# Altium PCB HE280PCB-panel.PcbDoc
Units mm, origin at the board's own origin, x right, y up, seen from the top; angles counter-clockwise.
Board outline 210.38 x 58.67 mm, 2 copper layers (Top Layer, Bottom Layer), stack 1.544 mm thick; 8 components, 271 nets, 12 pads, 0 vias.
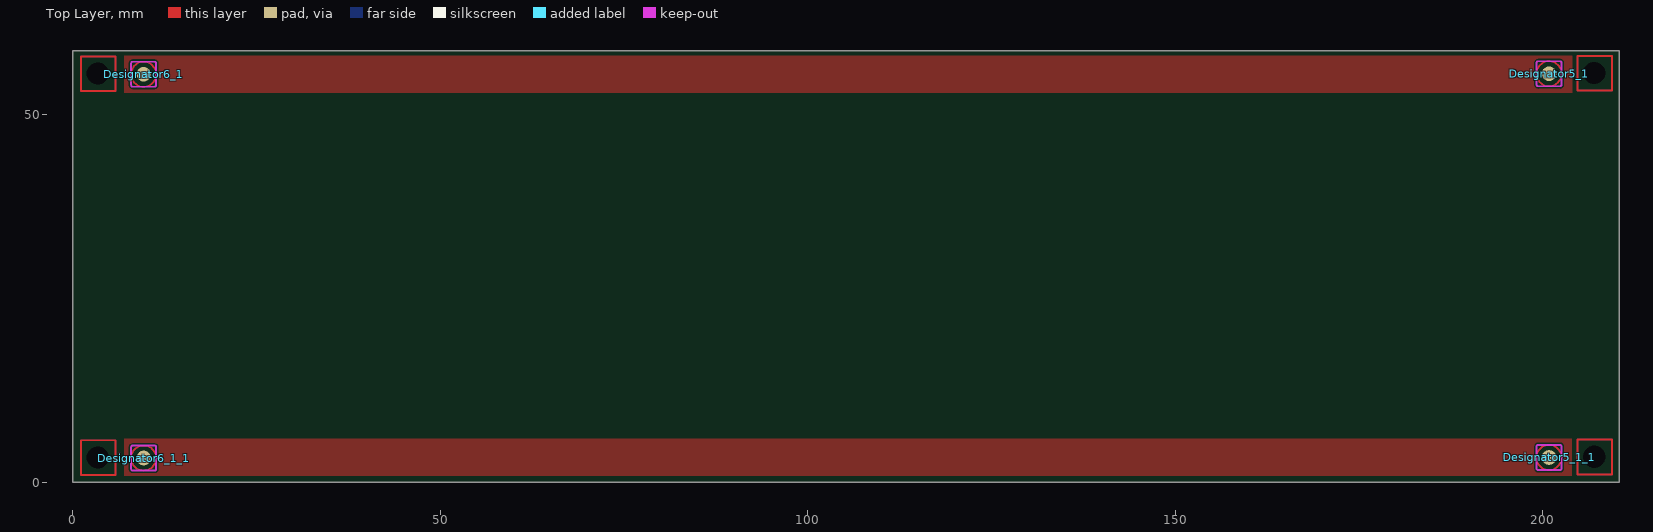
[diagram p0: Top Layer view]
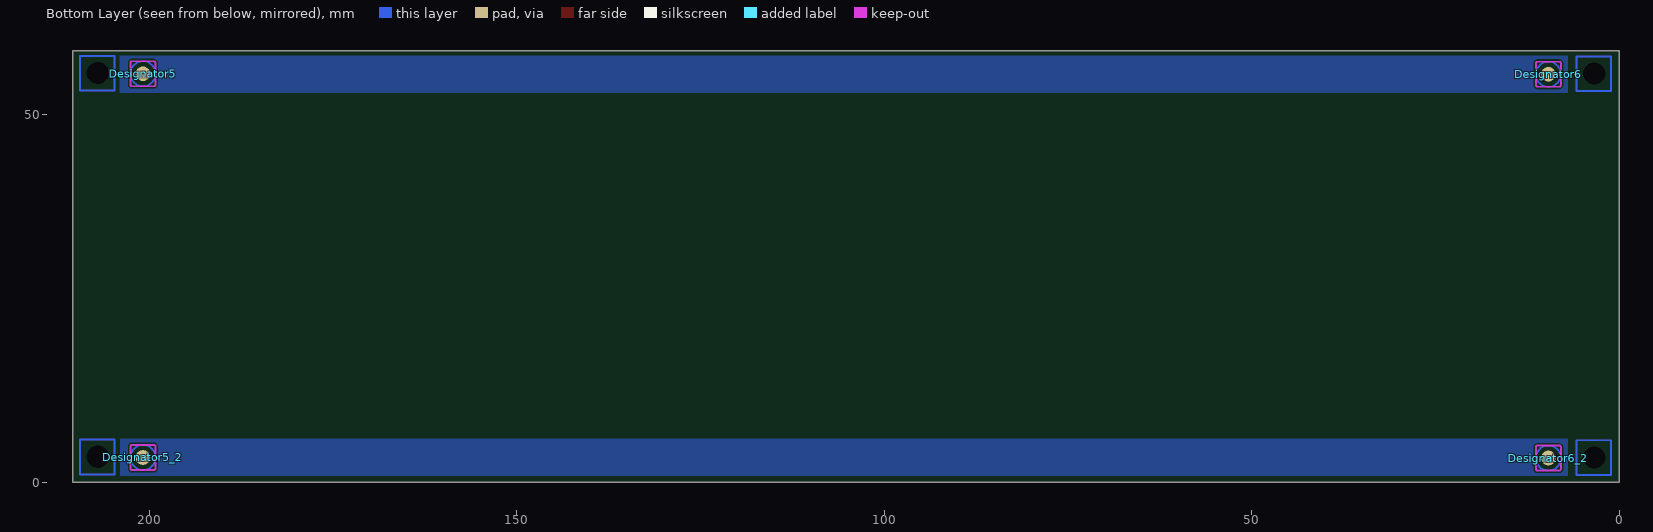
[diagram p1: Bottom Layer view, seen from below]

## Layer stack, top to bottom
Top Solder: solder mask 0.0102, Solder Resist, Dk 3.5
Top Layer: signal copper 0.0356
Dielectric1: core 1.4732, FR-4 TG170, Dk 4.2
Bottom Layer: signal copper 0.0356
Bottom Solder: solder mask 0.0102, Solder Resist, Dk 3.5

## Board outline
0,0 0,58.67 210.384,58.67 210.384,0

## Design rules (kind name [scope] priority, off if disabled: settings)
AcuteAngle [All] p1: minimum=6.00000000000000E+0001 checktracksonly=FALSE
AssemblyTestpoint [All] p1: testpointundercomponent=FALSE minsize=1.016 maxsize=2.54 preferedsize=1.524 minholesize=0 maxholesize=1.016 preferedholesize=0.813 testpointgrid=0.025 usegrid=FALSE gridtolerance=0 allowsidetop=TRUE allowsidebottom=TRUE minspacing=2.54 compbodyclearance=3.556
Clearance Clearance_PWR_INPUT_POLYGONS [InPolygon and InNetClass('PWR_INPUT')] p1: gap=0.254
Clearance Clearance_PWR_INPUT_POLYGONS_1 [InNetClass('Can bus')    and IsTrack] p2: gap=0.203
Clearance [All] p3: gap=0.178
DiffPairsRouting [All] p1: maxlimit=0.254 minlimit=0.178 mostfreqgap=0.203 toplayer_minwidth=0.178 toplayer_maxwidth=0.381 toplayer_prefwidth=0.203 bottomlayer_minwidth=0.178 bottomlayer_maxwidth=0.381 bottomlayer_prefwidth=0.203 maxuncoupledlength=5.08
FabricationTestPointUsage [All] p1: valid=2 allowmultiple=FALSE
FabricationTestpoint [All] p1: side=3 testpointundercomponent=TRUE minsize=1.016 maxsize=2.54 preferedsize=1.524 minholesize=0 maxholesize=1.016 preferedholesize=0.813 testpointgrid=0.025 allowsidetop=TRUE allowsidebottom=TRUE usegrid=FALSE gridtolerance=0
FanoutControl Fanout_SOIC [(InComponent('U8') AND InComponent('U7'))] p3: bgadir=Out bgaviamode=Centered fanoutstyle=Staggered fanoutdirection=Alternating viagrid=0.025 // Fanout_SOIC (Default Rule)
FanoutControl Fanout_Small [All] p4: bgadir=Out bgaviamode=Centered fanoutstyle=Auto fanoutdirection=Alternating viagrid=0.025 // Fanout_Small (Default Rule)
HoleSize [All] p1: absolutevalues=TRUE maxlimit=5.08 minlimit=0.254 maxpercent=80.000 minpercent=20.000
MinimumAnnularRing [All] p1: minimumring=0.178
MinimumSolderMaskSliver [All] p1 off: minsoldermaskwidth=0.254
PasteMaskExpansion [All] p1: expansion=-0.025
PlaneClearance [All] p1: clearance=0.178
PlaneConnect PlaneConnect_Via [IsVia] p1: planeconnectstyle=Direct reliefexpansion=0.889 reliefentries=4 reliefconductorwidth=1.27 reliefairgap=0.254
PlaneConnect PlaneConnect_C7_Ground [InComponent('C7') and OnLayer('Groun Plane')] p2: planeconnectstyle=Relief reliefexpansion=0.305 reliefentries=4 reliefconductorwidth=0.356 reliefairgap=0.254
PlaneConnect PlaneConnect_PWR_INPUT [InNetClass('PWR_INPUT')] p3: planeconnectstyle=NoConnect reliefexpansion=0.889 reliefentries=4 reliefconductorwidth=1.27 reliefairgap=0.254
PlaneConnect PlaneConnect_Power_Plane [OnLayer('Power Plane')] p4: planeconnectstyle=Relief reliefexpansion=0.305 reliefentries=4 reliefconductorwidth=0.356 reliefairgap=0.254
PlaneConnect PlaneConnect_GND_Plane [OnLayer('Groun Plane')] p5: planeconnectstyle=NoConnect reliefexpansion=0.889 reliefentries=4 reliefconductorwidth=1.27 reliefairgap=0.254
PlaneConnect [All] p6: planeconnectstyle=Relief reliefexpansion=0.305 reliefentries=4 reliefconductorwidth=0.356 reliefairgap=0.254
PolygonConnect Vias [IsVia] p1: connectstyle=Direct reliefconductorwidth=0.254 reliefentries=4 polygonreliefangle="90 Angle" airgapwidth=0.254
PolygonConnect "J3 Top" [InComponent('J3') vs ((InNet('NetF2_1') And OnLayer('Top Layer')) or (InNet('NetF1_1') And OnLayer('Top Layer')) or (InNet('GND') And OnLayer('Top Layer')) or (InNet('NetF3_1') And OnLayer('Top Layer')))] p2: connectstyle=Relief reliefconductorwidth=0.305 reliefentries=4 polygonreliefangle="90 Angle" airgapwidth=0.254
PolygonConnect "FAN-1 Top" [InComponent('FAN-1') vs ((InNet('+12VCC2') And OnLayer('Top Layer')) or (InNet('NetD10_C') And OnLayer('Top Layer')))] p3: connectstyle=Relief reliefconductorwidth=0.305 reliefentries=4 polygonreliefangle="90 Angle" airgapwidth=0.254
PolygonConnect "FAN-1 Bottom" [InComponent('FAN-1') vs ((InNet('+12VCC2') And OnLayer('Bottom Layer')) or (InNet('NetD10_C') And OnLayer('Bottom Layer')))] p4: connectstyle=Relief reliefconductorwidth=0.889 reliefentries=4 polygonreliefangle="90 Angle" airgapwidth=0.254
PolygonConnect "J3 Bottom" [InComponent('J3') vs ((InNet('NetF2_1') And OnLayer('Bottom Layer')) or (InNet('NetF1_1') And OnLayer('Bottom Layer')) or (InNet('GND') And OnLayer('Bottom Layer'))or (InNet('NetF3_1') And OnLayer('Bottom Layer')))] p5: connectstyle=Relief reliefconductorwidth=1.27 reliefentries=4 polygonreliefangle="90 Angle" airgapwidth=0.254
PolygonConnect "F2 Top" [InComponent('F2') vs ((InNet('NetF2_1') And OnLayer('Top Layer')) or (InNet('+12VCC2') And Onlayer('Top Layer')))] p6: connectstyle=Relief reliefconductorwidth=0.305 reliefentries=4 polygonreliefangle="90 Angle" airgapwidth=0.254
PolygonConnect "F3 Top" [InComponent('F3') vs ((InNet('NetF3_1') And OnLayer('Top Layer')) or (InNet('+12VCC1') And Onlayer('Top Layer')))] p7: connectstyle=Relief reliefconductorwidth=0.305 reliefentries=4 polygonreliefangle="90 Angle" airgapwidth=0.254
PolygonConnect "F2 Bottom" [InComponent('F2') vs ((InNet('NetF2_1') And OnLayer('Bottom Layer')) or (InNet('+12VCC2') And Onlayer('Bottom Layer')))] p8: connectstyle=Relief reliefconductorwidth=1.27 reliefentries=4 polygonreliefangle="90 Angle" airgapwidth=0.254
PolygonConnect "F3 Bottom" [InComponent('F3') vs ((InNet('NetF3_1') And OnLayer('Bottom Layer')) or (InNet('+12VCC1') And Onlayer('Bottom Layer')))] p9: connectstyle=Relief reliefconductorwidth=1.27 reliefentries=4 polygonreliefangle="90 Angle" airgapwidth=0.254
PolygonConnect "F1 Top" [InComponent('F1') vs ((InNet('+12VCC3') And OnLayer('Top Layer')) or (InNet('NetF1_1') And OnLayer('Top Layer')))] p10: connectstyle=Relief reliefconductorwidth=0.305 reliefentries=4 polygonreliefangle="90 Angle" airgapwidth=0.254
PolygonConnect "F1 Bottom" [InComponent('F1') vs ((InNet('+12VCC3') And OnLayer('Bottom Layer')) or (InNet('NetF1_1') And OnLayer('Bottom Layer')))] p11: connectstyle=Relief reliefconductorwidth=1.27 reliefentries=4 polygonreliefangle="90 Angle" airgapwidth=0.254
PolygonConnect "J1 Top" [InComponent('J1') vs ((InNet('+12VCC2') And OnLayer('Top Layer')) or (InNet('FN1') And OnLayer('Top Layer')) )] p12: connectstyle=Relief reliefconductorwidth=0.305 reliefentries=4 polygonreliefangle="90 Angle" airgapwidth=0.254
PolygonConnect "J1 Top HTBD" [InComponent('J1') vs ((InNet('HTBD') And OnLayer('Top Layer')) or (InNet('+12VCC3') And OnLayer('Top Layer')) or(InNet('HTR0') And OnLayer('Top Layer')) or (InNet('HTR1') And OnLayer('Top Layer')) or (InNet('HTRA') And OnLayer('Top Layer'))  )] p13: connectstyle=Relief reliefconductorwidth=1.27 reliefentries=4 polygonreliefangle="90 Angle" airgapwidth=0.254
PolygonConnect "J1 Bottom" [InComponent('J1') vs ((InNet('+12VCC2') And OnLayer('Bottom Layer'))or(InNet('HTR0') And OnLayer('Bottom Layer')) or (InNet('HTR1') And OnLayer('Bottom Layer')) or (InNet('HTRA') And OnLayer('Bottom Layer')) or (InNet('HTBD') And OnLayer('Bottom Layer')) or (InNet('+12VCC3') And OnLayer('Bottom Layer'))or (InNet('FN1') And OnLayer('Bottom Layer')))] p14: connectstyle=Relief reliefconductorwidth=1.27 reliefentries=4 polygonreliefangle="90 Angle" airgapwidth=0.254
PolygonConnect "Direct Connect" [(IsNamedPolygon('Motor-Thermal')) Or (IsNamedPolygon('Top Layer-MTR +')) Or (IsNamedPolygon('Fet-DirectConnect')) Or (IsNamedPolygon('DirectConnect') Or InComponent('D7') Or HasFootprint('TP-2') )] p15: connectstyle=Direct reliefconductorwidth=0.254 reliefentries=4 polygonreliefangle="90 Angle" airgapwidth=0.254
PolygonConnect [All] p16: connectstyle=Relief reliefconductorwidth=0.254 reliefentries=4 polygonreliefangle="90 Angle" airgapwidth=0.254
RoutingVias RoutingVias_<15mil [HoleSize < '15'] p1: holewidth=0.61 width=1.016 viastyle="Through Hole" minholewidth=0.254 minwidth=0.61 maxholewidth=1.27 maxwidth=1.778
RoutingVias [All] p2: holewidth=0.61 width=1.016 viastyle="Through Hole" minholewidth=0.381 minwidth=0.737 maxholewidth=1.27 maxwidth=1.778
SMDEntry [All] p1: side=TRUE corner=TRUE anyangle=TRUE
SMDToCorner [All] p1: distance=30000
SilkToSilkClearance [All] p1 off: silktosilkclearance=0.254
SilkToSolderMaskClearance SilkscreenOverComponentPads [IsPad] p1 off: minsilkscreentomaskgap=0.254 clearancetoexposedcopper=TRUE
SolderMaskExpansion [All] p1: expansion=0.102
Width Width_USB [InNet(UMCU_N) And InNet(UMCU_P)] p1: maxlimit=0.203 minlimit=0.203 preferedwidth=0.203
Width Width_Can [InNetClass('Can bus')] p2: maxlimit=0.203 minlimit=0.203 preferedwidth=0.203
Width [All] p3: maxlimit=5.08 minlimit=0.178 preferedwidth=0.203 minimp=50.000000 maximp=50.000000 favimp=50.000000
17 further rules are at their usual default settings.

## Classes and differential pairs
net class "Can bus": PA0_CANTX0 PA1_CANRX0
net class SD: MCCDA MCCK MCDA0 MCDA1 MCDA2 MCDA3 SDCD
net class STEP_BUS[1..4]: STEP_BUS1 STEP_BUS2 STEP_BUS3 STEP_BUS4
net class REF_BUS[1..4]: REF_BUS1 REF_BUS2 REF_BUS3 REF_BUS4
net class MOD2E_BUS[1..4]: MOD2E_BUS1 MOD2E_BUS2 MOD2E_BUS3 MOD2E_BUS4
net class MOD1E_BUS[1..4]: MOD1E_BUS1 MOD1E_BUS2 MOD1E_BUS3 MOD1E_BUS4
net class MOD0E_BUS[1..4]: MOD0E_BUS1 MOD0E_BUS2 MOD0E_BUS3 MOD0E_BUS4
net class EN_BUS[1..4]: EN_BUS1 EN_BUS2 EN_BUS3 EN_BUS4
net class DIR_BUS[1..4]: DIR_BUS1 DIR_BUS2 DIR_BUS3 DIR_BUS4
component class TR2: D3_ThermistorChannel2 D5_ThermistorChannel2 R19_ThermistorChannel2
component class TR1: C30_ThermistorChannel1 D3_ThermistorChannel1 D5_ThermistorChannel1 R19_ThermistorChannel1
net class MIN_ES_BUS[1..3]: MIN_ES0
net class MAX_ES_BUS[1..3]: MAX_ES0
component class Designator: F1 F2 R131 R132
component class Microcontroller: FD2 microSD
component class M1: R32_DriverChannelDRV88251 R33_DriverChannelDRV88251
component class M2: R32_DriverChannelDRV88252 R33_DriverChannelDRV88252
component class M3: R32_DriverChannelDRV88253 R33_DriverChannelDRV88253
component class M4: D5D D6D R32_DriverChannelDRV88254 R33_DriverChannelDRV88254 R129 R130
component class U_MZ: R32_DriverChannelDRV88255 R33_DriverChannelDRV88255
component class "U_MOSFETs and Driver": Q2 Q3
net class THERM_AN_BUS[1..4]: THERM_AN_BUS1 THERM_AN_BUS2 THERM_AN_BUS3 THERM_AN_BUS4
net class PWR_INPUT: +12VCC1 +12VCC2 +12VCC3 NetF1_1 NetF2_1 NetF3_1
net class SPI: PA25_MISO PA26_MOSI PA27_SCLK PA29_CS PB21_CS2 SPIFLASH_CS
component class USB: TP59a
channel class EndStops: ES1 ES2 ES3
channel class Motors: M1 M2 M3 M4
channel class Thermistors: TR1 TR2 TR3 TR4

## Components (designator, comment, footprint, x,y, rotation, side; value= is the part's Value field where it differs from the comment)
Designator5 "Comment" FIDUCIAL-2X3-PANEL 200.858,55.57 r90 bottom
Designator5_1 "Comment" FIDUCIAL-2X3-PANEL 200.858,55.57 r90 top
Designator5_1_1 "Comment" FIDUCIAL-2X3-PANEL 200.858,3.35 r90 top
Designator5_2 "Comment" FIDUCIAL-2X3-PANEL 200.858,3.35 r90 bottom
Designator6 "Comment" FIDUCIAL-2X3-PANEL 9.625,55.495 r90 bottom
Designator6_1 "Comment" FIDUCIAL-2X3-PANEL 9.625,55.495 r90 top
Designator6_1_1 "Comment" FIDUCIAL-2X3-PANEL 9.625,3.275 r90 top
Designator6_2 "Comment" FIDUCIAL-2X3-PANEL 9.625,3.275 r90 bottom

## Footprints (in the part's own frame and the unit in brackets; to place one, negate y for a bottom-side part, rotate by r counter-clockwise, add the part's x,y. Pads: shape width x height; smd on the part's side, far side on the other; paste and mask are expansions set on the pad)
FIDUCIAL-2X3-PANEL [mm]
  rrect100% 2x2 smd paste+0 mask+0.508: 1(0,0)
  Top Layer circle w0.178: c0,0 r1.7
  Keep-Out Layer region: -1.5,-1.7 -1.577,-1.685 -1.641,-1.641 -1.685,-1.577 -1.7,-1.5 -1.7,-1.5 -1.7,1.5 -1.685,1.577 -1.641,1.641 -1.577,1.685 -1.5,1.7 -1.5,1.7 1.5,1.7 1.577,1.685 1.641,1.641 1.685,1.577 1.7,1.5 1.7,1.5 1.7,-1.5 1.685,-1.577 1.641,-1.641 1.577,-1.685 1.5,-1.7 1.5,-1.7
  Keep-Out Layer lines w0.254: -1.5,-1.7 cw(c-1.5,-1.5) -1.7,-1.5 -1.7,1.5 cw(c-1.5,1.5) -1.5,1.7 1.5,1.7 cw(c1.5,1.5) 1.7,1.5 1.7,-1.5 cw(c1.5,-1.5) 1.5,-1.7 -1.5,-1.7
  body extent -1.02,-1.02 1.02,1.02, height 0.02

## Free pads (board coordinates)
  round 0 hole 3 unplated paste-99 mask-0.102: 0(3.375,3.375) 0(3.375,55.595) 1(207.008,3.45) 1(207.008,55.67)

## Nets (pads, with @x,y where several pads share a name; then routed paths per layer and width w, separated by ;. In a path a pad name is that pad's centre, name@x,y a point inside that pad or via, vN(x,y) a via of type N, cw(c..) or ccw(c..) an arc to the next point about the centre after c; other vN are vias at no path point)
3.3VCC: 
+5VCC: 
+12VCC1: 
+12VCC2: 
+12VCC3: 
BED_PWM: 
DECAYA: 
DECAYB: 
DECAYC: 
DECAYD: 
DECAYZ: 
DIR1: 
DIR2: 
DIR3: 
DIR4: 
DIR_Z: 
EN1: 
EN2: 
EN3: 
EN4: 
EN_Z: 
ERASE: 
FET_PWM1: 
FET_PWM2: 
FET_PWM3: 
FET_PWM4: 
FET_PWM5: 
FGND: 
FN1: 
GND: 
HOLD#: 
HTBD: 
HTR0: 
HTR1: 
HTRA: 
LED_R: 
LED_Y: 
MAX_ES1: 
MAX_ES2: 
MAX_ES3: 
MCCDA: 
MCCK: 
MCDA0: 
MCDA1: 
MCDA2: 
MCDA3: 
MIN_ES1: 
MIN_ES2: 
MIN_ES3: 
MOD0E1: 
MOD0E2: 
MOD0E3: 
MOD0E4: 
MOD0E_Z: 
MOD1E1: 
MOD1E2: 
MOD1E3: 
MOD1E4: 
MOD1E_Z: 
MOD2E1: 
MOD2E2: 
MOD2E3: 
MOD2E4: 
MOD2E_Z: 
NetC6_1: 
NetC6_2: 
NetC7_1: 
NetC17_2: 
NetC26_1: 
NetC41_1: 
NetC42_1: 
NetC43_2: 
NetC48_2: 
NetC49_1: 
NetC83_2: 
NetC84_2: 
NetC85_2: 
NetC86_2: 
NetC87_2: 
NetC96_2: 
NetC97_2: 
NetC98_1: 
NetC98_2: 
NetC99_1: 
NetC99_2: 
NetC100_1: 
NetC100_2: 
NetC101_1: 
NetC101_2: 
NetC102_1: 
NetC102_2: 
NetC103_2: 
NetC104_2: 
NetC105_2: 
NetC106_2: 
NetC107_2: 
NetC108_1: 
NetC110_1: 
NetC111_1: 
NetC112_1: 
NetC113_1: 
NetC123_2: 
NetC124_2: 
NetC125_2: 
NetC126_1: 
NetC127_2: 
NetC128_2: 
NetC129_2: 
NetC130_2: 
NetC131_2: 
NetC132_1: 
NetC133_1: 
NetC134_1: 
NetC135_1: 
NetC136_1: 
NetC137_1: 
NetC138_1: 
NetC139_1: 
NetC140_1: 
NetC141_1: 
NetC142_1: 
NetC143_1: 
NetC144_1: 
NetC145_1: 
NetD2_A: 
NetD9_A: 
NetD13_A: 
NetD16_A: 
NetD17_A: 
NetD18_A: 
NetD20_A: 
NetD23_A: 
NetD24_A: 
NetD25_A: 
NetD27_1: 
NetD27_3: 
NetD28_A: 
NetD29_A: 
NetD30_A: 
NetD31_A: 
NetD32_A: 
NetD33_A: 
NetD34_C: 
NetF1_1: 
NetF2_1: 
NetF3_1: 
NetJ14_1: 
NetJ15_1: 
NetJ16_1: 
NetJ17_1: 
NetL5_1: 
NetL5_4: 
NetQ1_4: 
NetQ2_4: 
NetQ3_4: 
NetQ4_4: 
NetQ5_1: 
NetQ6_1: 
NetR1_1: 
NetR2_1: 
NetR10_2: 
NetR15_1: 
NetR16_1: 
NetR17_1: 
NetR18_1: 
NetR19_1: 
NetR20_1: 
NetR21_1: 
NetR22_1: 
NetR23_1: 
NetR24_1: 
NetR25_1: 
NetR27_1: 
NetR42_1: 
NetR48_1: 
NetR51_1: 
NetR77_2: 
NetR82_2: 
NetR83_2: 
NetR121_2: 
NetR122_2: 
NetR123_2: 
NetR124_2: 
NetR125_2: 
NetR126_2: 
NetR127_2: 
NetR128_2: 
NetR129_2: 
NetR130_2: 
NetU3_2: 
NetU4_2: 
NetU5_2: 
NetU7_2: 
NRST: 
PA0_CANTX0: 
PA1_CANRX0: 
PA2_TIOA1: 
PA3_TIOB1: 
PA5_PWM: 
PA8_URXD: 
PA9_UTXD: 
PA12_RXD1: 
PA13_TXD1: 
PA14_RTS1: 
PA15_CTS1: 
PA16_SCK1: 
PA17_SDA: 
PA18_SCL: 
PA25_MISO: 
PA26_MOSI: 
PA27_SCLK: 
PA29_CS: 
PB0_ETXCK: 
PB1_ETXEN: 
PB2_ETX0: 
PB3_ETX1: 
PB4_ECRSDV: 
PB5_ERX0: 
PB6_ERX1: 
PB7_ERXER: 
PB8_EMDC: 
PB9_EMDIO: 
PB12_AD8: 
PB13_AD9: 
PB14_PWMH2: 
PB15_DAC0: 
PB16_DAC1: 
PB21_CS2: 
PB25_TIOA0: 
PB27_TIOB0: 
PC2_PWML0: 
REF1: 
REF2: 
REF3: 
REF4: 
REF_Z: 
RESET: 
SDCD: 
SHDN: 
SNTP: 
SPIFLASH_CS: 
STEP1: 
STEP2: 
STEP3: 
STEP4: 
STEP_Z: 
TCK/SWDCLK: 
TDI: 
TDO/SWO: 
THERM_AN1: 
THERM_AN2: 
THERM_AN3: 
THERM_AN4: 
TMS/SWDIO: 
UD_N: 
UD_P: 
UI_N: 
UI_P: 
UMCU_N: 
UMCU_P: 
USB_GND: 
USBSHIELD: 
VDD1: 
VDDANA: 
VDDOUT: 
VDDPLL: 
VDDUTMI: 
VUSB: 
WP#: 
XIN32: 
XOUT32: 
pads on no net: Designator5.1 Designator5_1.1 Designator5_1_1.1 Designator5_2.1 Designator6.1 Designator6_1.1 Designator6_1_1.1 Designator6_2.1
copper on no net: | length 150.4
  Top Layer w0.254: 1.1,0.975 1.1,5.7 5.775,5.7 5.775,0.975 1.1,0.975 ; 1.1,53.195 5.775,53.195 5.775,57.92 1.1,57.92 1.1,53.195 ; 204.733,1.05 204.733,5.775 209.408,5.775 209.408,1.05 204.733,1.05 ; 204.733,53.27 209.408,53.27 209.408,57.995 204.733,57.995 204.733,53.27
  Bottom Layer w0.254: 1.1,0.975 1.1,5.7 5.775,5.7 5.775,0.975 1.1,0.975 ; 1.1,53.195 5.775,53.195 5.775,57.92 1.1,57.92 1.1,53.195 ; 204.733,1.05 209.408,1.05 209.408,5.775 204.733,5.775 204.733,1.05 ; 204.733,53.27 204.733,57.995 209.408,57.995 209.408,53.27 204.733,53.27

## Polygon pours and split planes (outlines as drawn)
no net on Top Layer "Frame-Copper" (solid, pour order 0): 6.998,52.947 204.01,52.947 204.01,58.022 6.998,58.022
no net on Top Layer "Frame-Copper" (solid, pour order 8): 6.95,0.85 203.962,0.85 203.962,5.925 6.95,5.925
no net on Bottom Layer "Frame-Copper" (solid, pour order 2): 6.998,52.947 204.01,52.947 204.01,58.022 6.998,58.022
no net on Bottom Layer "Frame-Copper" (solid, pour order 10): 6.95,0.85 203.962,0.85 203.962,5.925 6.95,5.925
no net on Mechanical 2 "Fet-DirectConnect" (hatched 90Degree grid 0.508 track 0.203): 271.172,19.274 288.672,19.274 288.672,17.774 271.172,17.774 271.172,19.274
no net on Mechanical 2 "Fet-DirectConnect" (none): 272.172,26.738 272.172,19.01 286.172,19.01 287.672,19.01 287.672,26.738
no net on Mechanical 2 "Fet-DirectConnect" (hatched 90Degree grid 0.508 track 0.203): 271.172,28.01 288.672,28.01 288.672,26.51 271.172,26.51 271.172,28.01

## Silkscreen, mask and mechanical layers (free items; w line width, h text height)
Mechanical 2:
  text "NOTES (UNLESS SPECIFIED OTHERWISE)" at 235.672,151.51 h2.03
  text "1. FABRICATE PCB IN ACCORDANCE WITH IPC-A-600 CLASS 2 (LATEST REVISION)" at 238.172,144.01 h2.03
  text "2. THE PCB MUST BE LEAD FREE ASSEMBLY PROCESS COMPATIBLE." at 238.172,136.51 h2.03
  text "MUST HANDLE MINIMUM 6 CYCLES - 260C FOR 10 SECONDS." at 243.172,134.01 h2.03
  text "3. LAMINATE AND PREPREG TO BE FR4" at 238.172,126.51 h2.03
  text "4. PLATING FINISH - BOTH SIDES LEAD FREE HASL" at 238.172,119.01 h2.03
  text "5. SOLDERMASK - BOTH SIDES BLUE" at 238.172,111.51 h2.03
  text "7. FINISHED PCB MUST REMAIN PANELIZED FOR ASSEMBLY." at 238.172,96.51 h2.03
  text "MAXIMUM PANEL SIZE 250 X 280MM" at 243.586,91.948 h2.03
  text "8. SILKSCREEN - WHITE EPOXY INK, TOP SIDE. NO SILK ON PADS" at 238.172,74.01 h2.03
  text "9. SUPPLIER MARKING - ON SOLDER SIDE" at 238.172,66.51 h2.03
  text "ADD ROHS LOGO" at 243.172,61.51 h2.03
  text "ADD UL MARKING AND ID" at 243.172,56.51 h2.03
  text "10. LAYER STACKUP - SEE DETAIL A" at 238.172,49.01 h2.03
  text "DETAIL A - LAYER STACKUP" at 263.672,31.51 h2.54
  text "LAYER 1   TOP     1 OZ" at 290.172,26.51 h2.03
  text "0.062mil THICK" at 236.474,22.606 h2.03
  text "LAYER 2   BOTTOM  1 OZ" at 290.172,18.01 h2.03
Mechanical 30:
  the board outline again, w0.254
Mechanical 31:
  lines w0.254: 0,6.45 210.384,6.45 ; 0,52.22 210.384,52.22
Mechanical 32:
  lines w0.203: 0,6.45 12.192,6.45 ; 0,52.22 19.672,52.22 ; 28.702,52.22 73.66,52.22 ; 36.152,6.45 66.192,6.45 ; 82.672,52.22 127.672,52.22 ; 90.152,6.45 120.192,6.45 ; 136.672,52.22 181.672,52.22 ; 144.152,6.45 174.192,6.45 ; 190.754,52.22 210.384,52.22 ; 198.152,6.45 210.384,6.45

## Dimensions
271.172,28.01 to 271.172,17.774 on Mechanical 2

## Panel: embedded boards
"..\HE280PCB.PcbDoc" at 12.192,6.45, 1 rows x 4 columns, spacing 63.5 x 54, rotation 0